# Altium PCB PCB.PcbDoc
Units mm, origin at the board's own origin, x right, y up, seen from the top; angles counter-clockwise.
Board outline 32 x 10 mm, 2 copper layers (Top Layer, Bottom Layer), stack 1.56 mm thick; 23 components, 13 nets, 54 pads, 13 vias.
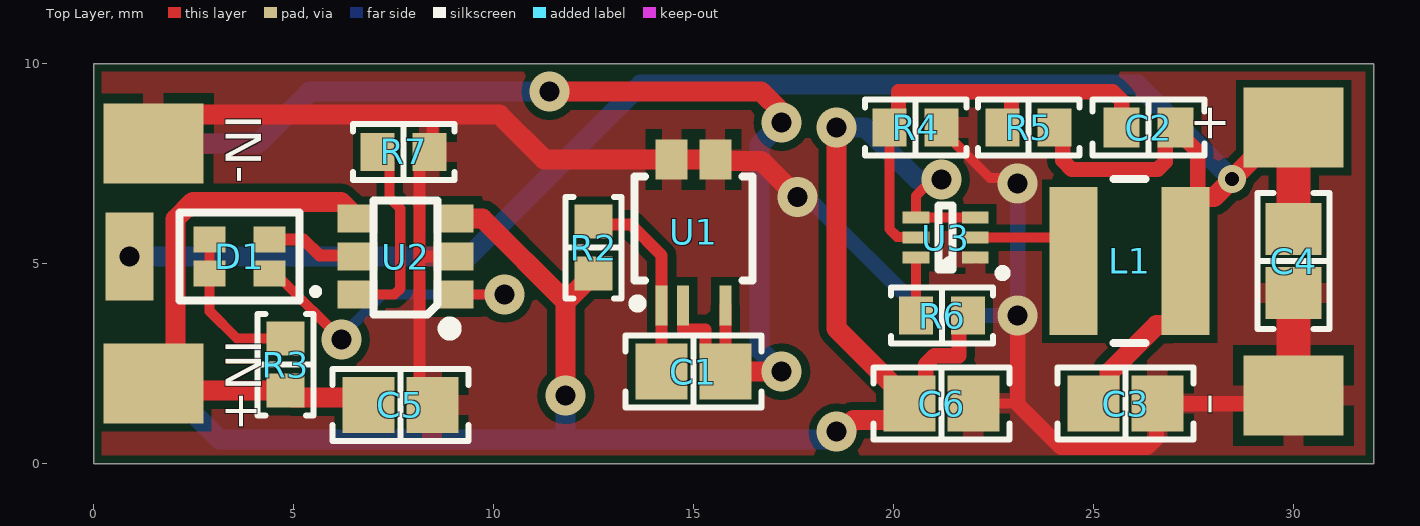
[diagram p0: Top Layer view]
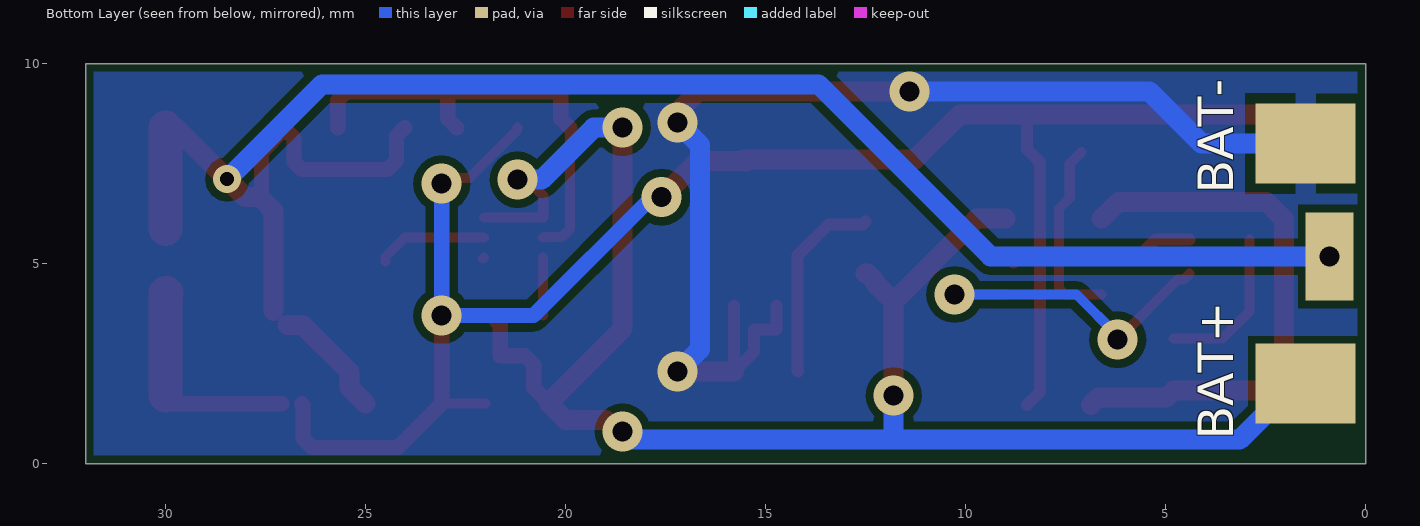
[diagram p1: Bottom Layer view, seen from below]
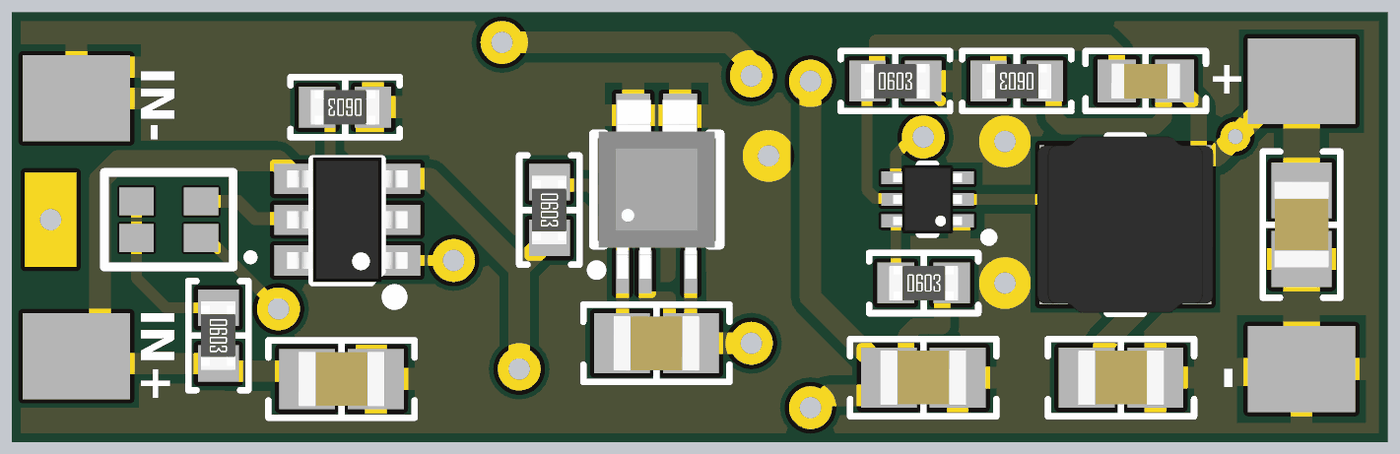
[diagram p2: 3D render of the assembled board from above, using the file's embedded part models]

## Layer stack, top to bottom
Top Solder: solder mask 0.02, Solder Resist, Dk 3.5
Top Layer: signal copper 0.03
Dielectric 1: dielectric 1.5, FR-4, Dk 4.8
Bottom Layer: signal copper 0.03
Bottom Solder: solder mask 0.02, Solder Resist, Dk 3.5

## Board outline
0,0 32,0 32,10 0,10

## Design rules (kind name [scope] priority, off if disabled: settings)
AssemblyTestPointUsage [All] p1 off:
AssemblyTestpoint [All] p1 off: testpointundercomponent=TRUE minsize=1.016 maxsize=2.54 preferedsize=1.524 minholesize=0 maxholesize=1.016 preferedholesize=0.813 testpointgrid=0.025 usegrid=TRUE gridtolerance=0 allowsidetop=TRUE allowsidebottom=TRUE
BoardOutlineClearance [All] p1: gap=0.2 ignorepadtopadclearanceinfootprint=FALSE except(0.4: Arc-SplitBarrior Arc-SplitContinuation Track-SplitBarrior Track-SplitContinuation SMDPad-SplitBarrior SMDPad-SplitContinuation THPad-SplitBarrior THPad-SplitContinuation Via-SplitBarrior Via-SplitContinuation Fill-SplitBarrior Fill-SplitContinuation Poly-SplitBarrior Poly-SplitContinuation Region-SplitBarrior Region-SplitContinuation Text-SplitBarrior Text-SplitContinuation)
Clearance "Clearance Bottom Layer" [OnLayer('Bottom Layer')] p1: gap=0.203 ignorepadtopadclearanceinfootprint=TRUE except(0.254: Arc-Text Track-Text SMDPad-Text THPad-Text Via-Text Fill-Text Poly-Text Region-Text Text-Text)
Clearance "Clearance Top Layer" [OnLayer('Top Layer')] p2: gap=0.203 ignorepadtopadclearanceinfootprint=TRUE except(0.254: Arc-Text Track-Text SMDPad-Text THPad-Text Via-Text Fill-Text Poly-Text Region-Text Text-Text)
Clearance [All] p3: gap=0.2 ignorepadtopadclearanceinfootprint=FALSE except(0.089: Arc-Arc Arc-Track Arc-SMDPad Track-Track Track-SMDPad SMDPad-SMDPad; 0.127: Arc-Via Track-Via SMDPad-Via THPad-Via Via-Via; 0.254: Arc-Text Track-Text SMDPad-Text THPad-Text Via-Text Fill-Text Poly-Text Region-Text Text-Text)
FabricationTestPointUsage [All] p1 off: valid=0 allowmultiple=FALSE
FabricationTestpoint [All] p1 off: side=3 testpointundercomponent=TRUE minsize=1.016 maxsize=2.54 preferedsize=1.524 minholesize=0 maxholesize=1.016 preferedholesize=0.813 testpointgrid=0.025 allowsidetop=TRUE allowsidebottom=TRUE usegrid=TRUE gridtolerance=0
HoleSize [All] p1: absolutevalues=TRUE maxlimit=6.3 minlimit=0.2 maxpercent=80.000 minpercent=20.000
MinimumAnnularRing [All] p1: minimumring=0.076
MinimumSolderMaskSliver [All] p1: minsoldermaskwidth=0.1
PolygonConnect PolygonConnect_1 [All] p1: thpad.connectstyle=Relief thpad.reliefconductorwidth=0.508 thpad.reliefentries=4 thpad.polygonreliefangle="90 Angle" thpad.airgapwidth=0.254 smdpad.connectstyle=Relief smdpad.reliefconductorwidth=0.508 smdpad.reliefentries=4 smdpad.polygonreliefangle="90 Angle" smdpad.airgapwidth=0.254 via.connectstyle=Direct via.reliefconductorwidth=0.508 via.reliefentries=4 via.polygonreliefangle="90 Angle" via.airgapwidth=0.254
RoomDefinition main [InComponentClass('main')] p1: confinementstyle=ConfineIn formatcopy=TRUE lockcomponents=FALSE outline -88.5,-61.5 -37.7,-61.5 -37.7,-36.1 -88.5,-36.1
RoutingCorners [All] p1: cornerstyle=Round minsetback=2.54 maxsetback=2.54
RoutingVias [All] p1: holewidth=0.5 width=1 viastyle="Through Hole" minholewidth=0.2 minwidth=0.45 maxholewidth=1 maxwidth=2
SilkToSilkClearance [All] p1: silktosilkclearance=0.1
SilkToSolderMaskClearance [IsPad] p1: minsilkscreentomaskgap=0.1 clearancetoexposedcopper=TRUE
SolderMaskExpansion [All] p1: expansion=0.102
Width [All] p1: maxlimit=2.54 minlimit=0.089 preferedwidth=0.381
21 further rules are at their usual default settings.

## Components (designator, comment, footprint, x,y, rotation, side; value= is the part's Value field where it differs from the comment)
+ "2MMx2.5MM" PAD_WITHOUT_HOLE_2X2.5MM#1 30,8.4 r90 top
- "2MMx2.5MM" PAD_WITHOUT_HOLE_2X2.5MM#1 30,1.7 r90 top
BAT+ "2MMx2.5MM" PAD_WITHOUT_HOLE_2X2.5MM#2 2.5,2.5 r270 bottom locked
BAT- "2MMx2.5MM" PAD_WITHOUT_HOLE_2X2.5MM#1 1.5,8 r90 bottom locked
C1 "0.1 µF" "CAP 0805_2012" 14.992,2.3 r180 top
C2 "120pF" "CAP 0603_1608" 26.375,8.4 r0 top
C3 "22µF" "CAP 0805_2012" 25.8,1.5 r180 top
C4 "22µF" "CAP 0805_2012" 30,5.06 r90 top
C5 "2.2 µF" "CAP 0805_2012" 7.667,1.469 r180 top
C6 "4.7µF" "CAP 0805_2012" 21.2,1.5 r180 top
D1 "Bicolor 1615" "LED 0603 1615 BICOLOR" 3.65,5.176 r180 top locked
IN+ "2MMx2.5MM" PAD_WITHOUT_HOLE_2X2.5MM#1 1.5,2 r90 top locked
IN- "2MMx2.5MM" PAD_WITHOUT_HOLE_2X2.5MM#1 1.5,8 r90 top locked
L1 "1 uH" "TAIYO YUDEN NR4018" 25.9,5.06 r0 top value="15 µH"
R2 "1 kOhms" "RES 0603_1608" 12.5,5.4 r270 top
R3 "330 Ohms" "RES 0603_1608" 4.8,2.477 r270 top
R4 "100 kOhms" "RES 0603_1608" 20.55,8.4 r0 top
R5 "150 kOhms" "RES 0603_1608" 23.374,8.4 r180 top
R6 "499 kOhms" "RES 0603_1608" 21.21,3.7 r0 top
R7 "3.9 kOhms" "RES 0603_1608" 7.75,7.795 r180 top
U1 "XB7608A" "PCB - LEADED - XYSEMI CPC5" 15,5.803 r0 top
U2 "TP4056" "SMD IC SOT-23-6" 7.8,5.177 r0 top
U3 "TPS62A01DRLR" "TI SOT-563 DRL" 21.3,5.65 r180 top

## Footprints (in the part's own frame and the unit in brackets; to place one, negate y for a bottom-side part, rotate by r counter-clockwise, add the part's x,y. Pads: shape width x height; smd on the part's side, far side on the other; paste and mask are expansions set on the pad)
"CAP 0603_1608" [mm] "Chip Capacitor, 2-Leads, Body 1.60x0.80mm, IPC Medium Density"
  rect 0.9x1 smd: 1(-0.675,0) 2(0.675,0)
  silkscreen extent -1.4,-0.7 1.4,0.7, body extent -0.8,-0.41 0.8,0.41, height 0.82
"CAP 0805_2012" [mm] "Chip Capacitor, 2-Leads, Body 2.00x1.20mm, IPC Medium Density"
  rect 1.3x1.4 smd: 1(-0.8,0) 2(0.8,0)
  silkscreen extent -1.7,-0.9 1.7,0.9, body extent -1,-0.64 1,0.64, height 1.26
"LED 0603 1615 BICOLOR" [mm] "SMD SMT Light Emitting Diode 1.6*0.8*0.6MM"
  rect 0.8x0.65 smd mask+0.05: 1(-0.75,0.425) 2(0.75,0.425) 3(-0.75,-0.425) 4(0.75,-0.425)
  silkscreen extent -1.94,-1.1 1.5,1.1
PAD_WITHOUT_HOLE_2X2.5MM#1 [mm]
  rect 2x2.5 smd: 1(0,0)
PAD_WITHOUT_HOLE_2X2.5MM#2 [mm]
  rect 2x2.5 smd: 1(0.5,1)
"PCB - LEADED - XYSEMI CPC5" [mm] "POD-CPC5"
  rect 0.3x1 smd: 1(-0.798,-1.847) 2(-0.268,-1.847) 3(0.792,-1.847)
  rect 0.8x1 smd: 4(0.542,1.803) 5(-0.548,1.803)
  silkscreen extent -1.5,-1.9 1.47,1.37, body extent -1.35,-2.01 1.35,2.16, height 1.05
"RES 0603_1608" [mm] "Chip Resistor, 2-Leads, Body 1.60x0.80mm, IPC Medium Density"
  rect 0.85x0.95 smd: 1(-0.65,0) 2(0.65,0)
  silkscreen extent -1.27,-0.7 1.27,0.7, body extent -0.8,-0.4 0.8,0.4, height 0.45
"SMD IC SOT-23-6" [mm] "SOT-223/SC-73; 4 Leads; Body 6.7 x 7.3 mm, inc. leads (LxW max)"
  rect 1x0.7 smd: 1(1.2,-0.95) 2(1.2,0) 3(1.2,0.95) 4(-1.2,0.95) 5(-1.2,0) 6(-1.2,-0.95)
  silkscreen extent -0.8,-1.9 1.2,1.4, body extent -1.4,-1.45 1.4,1.45, height 1.45
"TAIYO YUDEN NR4018" [mm] "Power Inductor, 2-Leads,Taiyo Yuden, NR4018T100M"
  rect 1.2x3.7 smd: 1(-1.4,0) 2(1.4,0)
  silkscreen extent -0.4,-2.05 0.4,2.05, body extent -2.05,-2.05 2.05,2.05, height 1.8
"TI SOT-563 DRL" [mm] "SOT DRL, 6-Leads, Body 1.10x1.60mm, Pitch 0.5mm, IPC Medium Density"
  rect 0.67x0.3 smd mask+0.07: 1(-0.74,0.5) 2(-0.74,0) 3(-0.74,-0.5) 4(0.74,-0.5) 5(0.74,0) 6(0.74,0.5)
  silkscreen extent -1.52,-0.8 0.18,0.99, body extent -0.8,-0.8 0.8,0.8, height 0.6

## Part data
+ - BAT+ BAT- IN+ IN-: library part PAD_WITHOUT_HOLE_3X3.5MM, "High: 3mm Length: 3.5mm"
C1: library part VJ0805Y104KFAAT, "SMT Capacitor", Device Package="0805 (2012 Metric)", manufacturer="Vishay Vitramon", Operating Temperature="-55°C ~ 150°C", Supplier Part Number 1=720-1753-1-ND, Temperature Coefficient=X7R, Tolerance=±10%, Voltage - Rated=50V, Applications="General Purpose", Capacitance="0.1 µF", componentlink1description=Datasheet, componentlink1url=http://www.vishay.com/docs/45199/vjcommercialseries.pdf, componentlink2description="DigiKey Link", componentlink2url=https://www.digikey.com/en/products/detail/vishay-vitramon/VJ0805Y104KFAAT/8311061, id=199, lastupdated=2023-01-03T20:10:53.590, Lifecycle Status=Active, Minimum Order=1, Mounting Type="Surface Mount, MLCC", Package / Case="0805 (2012 Metric)", packaging=TapeAndReel, partid=3420, Part Number=VJ0805Y104KFAAT, Part Status=Active, price=0.16, series=VJ, Size / Dimension="0.079\" L x 0.049\" W (2.00mm x 1.25mm)", Supplier 1=DigiKey, Thickness (Max)="0.057\" (1.45mm)"
C2: library part 06031A121KAT2A, "SMT Capacitor", Device Package="0603 (1608 Metric)", manufacturer="AVX Corporation", Operating Temperature="-55°C ~ 125°C", Supplier Part Number 1=478-6023-1-ND, Temperature Coefficient="C0G, NP0", Tolerance=±10%, Voltage - Rated=100V, Applications="General Purpose", Capacitance=120pF, componentlink1description=Datasheet, componentlink1url=http://datasheets.avx.com/C0GNP0-Dielectric.pdf, componentlink2description="DigiKey Link", componentlink2url=http://digikey.com/product-detail/en/avx-corporation/06031A121KAT2A/478-6023-1-ND/2208937, id=955, lastupdated=2020-09-02T01:03:28.977, Lifecycle Status=Active, Minimum Order=1, Mounting Type="Surface Mount, MLCC", Package / Case="0603 (1608 Metric)", packaging=TapeAndReel, partid=6218, Part Number=06031A121KAT2A, Part Status=Active, price=0.04, series=-, Size / Dimension="0.063\" L x 0.032\" W (1.60mm x 0.81mm)", Supplier 1=DigiKey, Thickness (Max)="0.035\" (0.90mm)"
C3 C4: library part 08056D226KAT2A, "SMT Capacitor", Device Package="0805 (2012 Metric)", manufacturer="AVX Corporation", Operating Temperature="-55°C ~ 85°C", Supplier Part Number 1=478-10069-1-ND, Temperature Coefficient=X5R, Tolerance=±10%, Voltage - Rated=6.3V, Applications="General Purpose", Capacitance=22µF, componentlink1description=Datasheet, componentlink1url=http://datasheets.avx.com/cx5r.pdf, componentlink2description="DigiKey Link", componentlink2url=http://digikey.com/product-detail/en/avx-corporation/08056D226KAT2A/478-10069-1-ND/6564291, id=197, lastupdated=2020-09-02T01:04:40.007, Lifecycle Status=Active, Minimum Order=1, Mounting Type="Surface Mount, MLCC", Package / Case="0805 (2012 Metric)", packaging=TapeAndReel, partid=3404, Part Number=08056D226KAT2A, Part Status=Active, price=0.18, series=-, Size / Dimension="0.079\" L x 0.049\" W (2.01mm x 1.25mm)", Supplier 1=DigiKey, Thickness (Max)="0.060\" (1.52mm)"
C5: library part GCM21BR71E225KA73K, "SMT Capacitor", Device Package="0805 (2012 Metric)", manufacturer="Murata Electronics", Operating Temperature="-55°C ~ 125°C", Ratings=AEC-Q200, Supplier Part Number 1=490-14744-1-ND, Temperature Coefficient=X7R, Tolerance=±10%, Voltage - Rated=25V, Applications=Automotive, Capacitance="2.2 µF", componentlink1description=Datasheet, componentlink1url=https://search.murata.co.jp/Ceramy/image/img/A01X/G101/ENG/GCM21BR71E225KA73-01.pdf, componentlink2description="DigiKey Link", componentlink2url=https://www.digikey.com/en/products/detail/murata-electronics/GCM21BR71E225KA73K/2592259, id=682, lastupdated=2023-01-03T20:10:47.513, Lifecycle Status=Active, Minimum Order=1, Mounting Type="Surface Mount, MLCC", Package / Case="0805 (2012 Metric)", packaging=TapeAndReel, partid=6110, Part Number=GCM21BR71E225KA73K, Part Status=Active, price=0.06, series=GCM, Size / Dimension="0.079\" L x 0.049\" W (2.00mm x 1.25mm)", Supplier 1=DigiKey, Thickness (Max)="0.055\" (1.40mm)"
C6: library part 0805ZD475KAT2A, "SMT Capacitor", Device Package="0805 (2012 Metric)", manufacturer="AVX Corporation", Operating Temperature="-55°C ~ 85°C", Supplier Part Number 1=478-1415-1-ND, Temperature Coefficient=X5R, Tolerance=±10%, Voltage - Rated=10V, Applications="General Purpose", Capacitance=4.7µF, componentlink1description=Datasheet, componentlink1url=http://datasheets.avx.com/cx5r.pdf, componentlink2description="DigiKey Link", componentlink2url=http://digikey.com/product-detail/en/avx-corporation/0805ZD475KAT2A/478-1415-1-ND/564447, id=128, lastupdated=2020-09-02T01:04:40.453, Lifecycle Status=Active, Minimum Order=1, Mounting Type="Surface Mount, MLCC", Package / Case="0805 (2012 Metric)", packaging=TapeAndReel, partid=3139, Part Number=0805ZD475KAT2A, Part Status=Active, price=0.12, series=-, Size / Dimension="0.079\" L x 0.049\" W (2.01mm x 1.25mm)", Supplier 1=DigiKey, Thickness (Max)="0.055\" (1.40mm)"
D1: library part "LED 0603 1615", "SMD SMT Light Emitting Diode 1.6*0.8*0.6MM", componentlink1description=Aliexpress, componentlink1url=https://www.aliexpress.com/item/4001174921701.html?spm=a2g0o.order_list.0.0.12d31802vfu5Sp
L1: library part NR4018T150M, "FIXED IND 1UH 650MA 300MOHM SMD", Current Rating (Amps)="650 mA", DC Resistance (DCR)="300mOhm Max", Frequency - Self Resonant=19MHz, Inductance="15 µH", Inductance Frequency - Test="100 kHz", manufacturer="Taiyo Yuden", Operating Temperature="-25°C ~ 120°C", Supplier Part Number 1=587-NR4018T150MCT-ND, Tolerance=±20%, componentlink1description=Datasheet, componentlink1url=https://www.yuden.co.jp/productdata/catalog/wound04_e.pdf, componentlink2description="DigiKey Link", componentlink2url=https://www.digikey.com/en/products/detail/taiyo-yuden/NR4018T150M/1171820, Height - Seated (Max)="0.071\" (1.80mm)", id=3749, lastupdated=2023-01-02T21:11:24.473, Lifecycle Status=Active, Material - Core=Ferrite, Minimum Order=1, Mounting Type="Surface Mount", packaging=TapeAndReel, partid=3777, Part Number=NR4018T150M, Part Status=Active, price=0.13, series=NR, Shielding=Shielded, Size / Dimension="0.157\" L x 0.157\" W (4.00mm x 4.00mm)", Supplier 1=DigiKey, Type="Drum Core, Wirewound"
R2: library part ERJ-U3RD1001V, "RES 1K OHM 0.5% 1/10W 0603 SMD", Device Package="0603 (1608 Metric)", manufacturer="Panasonic Electronic Components", Operating Temperature="-55°C ~ 155°C", Power (Watts)="0.1W, 1/10W", Ratings=AEC-Q200, Supplier Device Package=0603, Supplier Part Number 1=10-ERJ-U3RD1001VCT-ND, Temperature Coefficient=±50ppm/°C, Tolerance=±0.5%, componentlink1description=Datasheet, componentlink1url=https://industrial.panasonic.com/cdbs/www-data/pdf/RDP0000/RDP0000C343.pdf, componentlink2description="DigiKey Link", componentlink2url=https://www.digikey.com/en/products/detail/panasonic-electronic-components/ERJ-U3RD1001V/12549507, Composition="Thick Film", Features="Anti-Sulfur, Automotive AEC-Q200", Height - Seated (Max)="0.022\" (0.55mm)", id=17229, lastupdated=2023-01-02T20:27:49.777, Lifecycle Status=Active, Minimum Order=1, Number of Terminations=2, Package / Case="0603 (1608 Metric)", packaging=TapeAndReel, partid=69166, Part Number=ERJ-U3RD1001V, Part Status=Active, price=0.03, Resistance="1 kOhms", series=ERJ-U3R, Size / Dimension="0.063\" L x 0.031\" W (1.60mm x 0.80mm)", Supplier 1=DigiKey
R3: library part ERA-3AEB331V, "RES SMD 330 OHM 0.1% 1/10W 0603", Device Package="0603 (1608 Metric)", manufacturer="Panasonic Electronic Components", Operating Temperature="-55°C ~ 155°C", Power (Watts)="0.1W, 1/10W", Ratings=AEC-Q200, Supplier Device Package=0603, Supplier Part Number 1=P330DBCT-ND, Temperature Coefficient=±25ppm/°C, Tolerance=±0.1%, componentlink1description=Datasheet, componentlink1url=https://industrial.panasonic.com/cdbs/www-data/pdf/RDM0000/AOA0000C307.pdf, componentlink2description="DigiKey Link", componentlink2url=https://www.digikey.com/en/products/detail/panasonic-electronic-components/ERA-3AEB331V/1465842, Composition="Thin Film", Features="Automotive AEC-Q200", Height - Seated (Max)="0.022\" (0.55mm)", id=331, lastupdated=2023-01-02T20:30:24.253, Lifecycle Status=Active, Minimum Order=1, Number of Terminations=2, Package / Case="0603 (1608 Metric)", packaging=TapeAndReel, partid=5565, Part Number=ERA-3AEB331V, Part Status=Active, price=0.03, Resistance="330 Ohms", series=ERA-3A, Size / Dimension="0.063\" L x 0.031\" W (1.60mm x 0.80mm)", Supplier 1=DigiKey
R4: library part ERJ-U03J104V, "RES 100K OHM 5% 1/10W 0603 SMD", Device Package="0603 (1608 Metric)", manufacturer="Panasonic Electronic Components", Operating Temperature="-55°C ~ 155°C", Power (Watts)="0.1W, 1/10W", Ratings=AEC-Q200, Supplier Device Package=0603, Supplier Part Number 1=10-ERJ-U03J104VCT-ND, Temperature Coefficient=±200ppm/°C, Tolerance=±5%, componentlink1description=Datasheet, componentlink1url=https://industrial.panasonic.com/cdbs/www-data/pdf/RDP0000/AOA0000C334.pdf, componentlink2description="DigiKey Link", componentlink2url=https://www.digikey.com/en/products/detail/panasonic-electronic-components/ERJ-U03J104V/11635952, Composition="Thick Film", Features="Anti-Sulfur, Automotive AEC-Q200", Height - Seated (Max)="0.022\" (0.55mm)", id=16727, lastupdated=2023-01-02T20:27:56.093, Lifecycle Status=Active, Minimum Order=1, Number of Terminations=2, Package / Case="0603 (1608 Metric)", packaging=TapeAndReel, partid=67627, Part Number=ERJ-U03J104V, Part Status=Active, price=0.01, Resistance="100 kOhms", series=ERJ-U03, Size / Dimension="0.063\" L x 0.031\" W (1.60mm x 0.80mm)", Supplier 1=DigiKey
R5: library part ERJ-H3ED1503V, "RES 150K OHM 0.5% 1/6W 0603", Device Package="0603 (1608 Metric)", manufacturer="Panasonic Electronic Components", Operating Temperature="-55°C ~ 175°C", Power (Watts)="0.125W, 1/8W", Ratings=AEC-Q200, Supplier Device Package=0603, Supplier Part Number 1=10-ERJ-H3ED1503VCT-ND, Temperature Coefficient=±100ppm/°C, Tolerance=±0.5%, componentlink1description=Datasheet, componentlink1url=https://b2b-api.panasonic.eu/file_stream/pids/fileversion/236250, componentlink2description="DigiKey Link", componentlink2url=https://www.digikey.com/en/products/detail/panasonic-electronic-components/ERJ-H3ED1503V/13878124, Composition="Thick Film", Features="Automotive AEC-Q200", Height - Seated (Max)="0.022\" (0.55mm)", id=15235, lastupdated=2023-01-02T20:28:19.700, Lifecycle Status=Active, Minimum Order=1, Number of Terminations=2, Package / Case="0603 (1608 Metric)", packaging=TapeAndReel, partid=63770, Part Number=ERJ-H3ED1503V, Part Status=Active, price=0.04, Resistance="150 kOhms", series=ERJ-H3E, Size / Dimension="0.063\" L x 0.031\" W (1.60mm x 0.80mm)", Supplier 1=DigiKey
R6: library part ERJ-3EKF4993V, "RES SMD 499K OHM 1% 1/10W 0603", Device Package="0603 (1608 Metric)", manufacturer="Panasonic Electronic Components", Operating Temperature="-55°C ~ 155°C", Power (Watts)="0.1W, 1/10W", Ratings=AEC-Q200, Supplier Device Package=0603, Supplier Part Number 1=P499KHCT-ND, Temperature Coefficient=±100ppm/°C, Tolerance=±1%, componentlink1description=Datasheet, componentlink1url=https://industrial.panasonic.com/cdbs/www-data/pdf/RDA0000/AOA0000C304.pdf, componentlink2description="DigiKey Link", componentlink2url=https://www.digikey.com/en/products/detail/panasonic-electronic-components/ERJ-3EKF4993V/196382, Composition="Thick Film", Features="Automotive AEC-Q200", Height - Seated (Max)="0.022\" (0.55mm)", id=9264, lastupdated=2023-01-02T20:29:07.173, Lifecycle Status=Active, Minimum Order=1, Number of Terminations=2, Package / Case="0603 (1608 Metric)", packaging=TapeAndReel, partid=23062, Part Number=ERJ-3EKF4993V, Part Status=Active, price=0.01, Resistance="499 kOhms", series=ERJ-3EK, Size / Dimension="0.063\" L x 0.031\" W (1.60mm x 0.80mm)", Supplier 1=DigiKey
R7: library part ERJ-3GEYJ392V, "RES SMD 3.9K OHM 5% 1/10W 0603", Device Package="0603 (1608 Metric)", manufacturer="Panasonic Electronic Components", Operating Temperature="-55°C ~ 155°C", Power (Watts)="0.1W, 1/10W", Ratings=AEC-Q200, Supplier Device Package=0603, Supplier Part Number 1=P3.9KGCT-ND, Temperature Coefficient=±200ppm/°C, Tolerance=±5%, componentlink1description=Datasheet, componentlink1url=http://industrial.panasonic.com/www-cgi/jvcr13pz.cgi?E+PZ+3+AOA0001+ERJ3GEYJ392V+7+WW, componentlink2description="DigiKey Link", componentlink2url=https://www.digikey.com/en/products/detail/panasonic-electronic-components/ERJ-3GEYJ392V/135900, Composition="Thick Film", Features="Automotive AEC-Q200", Height - Seated (Max)="0.022\" (0.55mm)", id=7011, lastupdated=2023-01-02T20:29:27.293, Lifecycle Status=Active, Minimum Order=1, Number of Terminations=2, Package / Case="0603 (1608 Metric)", packaging=TapeAndReel, partid=19216, Part Number=ERJ-3GEYJ392V, Part Status=Active, price=0.01, Resistance="3.9 kOhms", series=ERJ-3G, Size / Dimension="0.063\" L x 0.031\" W (1.60mm x 0.80mm)", Supplier 1=DigiKey
U1: "CPC-5 Battery Management IC"
U2: library part TP4057, "500mA Linear Li-Ion Battery Charger", componentlink1description=Datasheet, componentlink1url=https://pdf1.alldatasheet.com/datasheet-pdf/view/1134940/TPOWER/TP4057.html
U3: "2.5-V to 5.5-V input, 1-A high-efficiency step-down converter with forced PWM in SOT-563 package", Mfr_Name="Texas Instruments", componentlink1description=Datasheet, componentlink1url=https://www.ti.com/document-viewer/TPS62A01A/datasheet/GUID-583A9EFF-0876-4B6A-9171-86BE16EA9829#GUID-016A0F07-62BF-4703-9B43-9200616E2C9F, Copyright="Copyright (C) 2022 Ultra Librarian. All rights reserved.", Manufacturer_Part_Number=TPS62A01DRLR, RefDes=RefDes, Type=DEV

## Free pads (board coordinates)
  rect 1.2x2.2 hole 0.5: 2(0.9,5.177)

## Via types
v1: diameter 1, hole 0.5, Top Layer to Bottom Layer, 12 vias
v2: diameter 0.7, hole 0.35, Top Layer to Bottom Layer, 1 vias

## Nets (pads, with @x,y where several pads share a name; then routed paths per layer and width w, separated by ;. In a path a pad name is that pad's centre, name@x,y a point inside that pad or via, vN(x,y) a via of type N, cw(c..) or ccw(c..) an arc to the next point about the centre after c; other vN are vias at no path point)
5V: C5.2 IN+.1 R3.2 U2.4 | length 14.8
  Top Layer w0.5: U2.4 6.18,6.547 2.48,6.547 2.047,6.114 2.047,2.547 IN+.1 1.673,1.827 R3.2 4.975,1.652 6.684,1.652 C5.2
BAT+: BAT+.1 C6.2 R2.2 R6.2 U2.3 U3.3 U3.4 | length 44.7
  Top Layer w0.254: v1@21.2,6.965 20.829,6.965 20.56,6.695 U3.4 U3.3
  Top Layer w0.381: C6.2 20.8,1.9 20.8,2.477 21.023,2.7 21.637,2.7 21.637,3.477 R6.2
  Top Layer w0.5: U2.3 9.723,6.127 11.8,4.05 ; v1(11.8,1.7) 11.8,4.05 ; R2.2 12.45,4.75 12.275,4.575 12.275,4.525 11.8,4.05 ; v1(18.575,0.8) 18.71,0.8 19,1.09 20,1.09 20.4,1.49 C6.2 20.4,1.55 18.575,3.375 v1(18.575,8.4)
  Bottom Layer w0.5: BAT+.1 1.75,2 3.15,0.6 11.8,0.6 ; v1(11.8,1.7) 11.8,0.6 ; v1(18.575,0.8) 18.375,0.6 11.8,0.6 ; v1(18.575,8.4) 19.298,8.4 20.598,7.1 v1(21.2,7.1)
BAT-: BAT-.1 C1.1 U1.2 U1.3 | length 28.9
  Top Layer w0.3: U1.2 14.732,3.358 15.292,3.358 15.292,2.8 C1.1 U1.3
  Top Layer w0.5: v1(11.4,9.3) 16.69,9.3 17.2,8.79 v1(17.2,8.523) ; C1.1 v1(17.2,2.3)
  Bottom Layer w0.5: BAT-.1 4.1,8 5.4,9.3 v1(11.4,9.3) ; v1(17.2,2.3) 16.647,2.853 16.647,7.97 v1(17.2,8.523)
CHARGE: D1.1 U2.1 | length 8.4
  Top Layer w0.254: D1.1 4.549,4.602 4.698,4.602 v1(6.2,3.1) ; U2.1 v1(10.273,4.227)
  Bottom Layer w0.254: v1(6.2,3.1) 6.2,3.2 7.227,4.227 v1(10.273,4.227)
CHARGE-: -.1 C3.1 C4.1 C5.1 C6.1 IN-.1 R4.2 R7.1 U1.4 U1.5 U2.2 U3.1 | length 51.9
  Top Layer w0.254: R4.2 21.2,8.35 22.41,7.14 22.957,7.14 v1(23.1,6.998) ; C6.1 23.093,1.5 23.1,1.493 ; U3.1 U3.1@22.063,5.127
  Top Layer w0.3: C5.1 8.147,1.789 8.147,5.177 ; 8.467,8.723 8.467,7.862 R7.1 8.147,7.542 8.147,5.177 ; U2.2@8.8,5.027 8.65,5.177 8.147,5.177
  Top Layer w0.381: v1(23.1,3.701) 23.1,1.493 24.187,0.406 26.346,0.406 26.569,0.629 26.569,1.469 C3.1 ; C3.1@27.1,1.5 29.8,1.5 -.1
  Top Layer w0.5: IN-.1 2.223,8.723 8.467,8.723 10.147,8.723 11.264,7.606 U1.5 15.442,7.606 15.492,7.556 U1.4 15.578,7.57 16.69,7.57 v1(17.6,6.66)
  Top Layer w0.85: C4.1@29.975,4.26 C4.1 -.1
  Bottom Layer w0.381: v1(17.6,6.66) 17.846,6.66 20.806,3.701 v1(23.1,3.701) v1(23.1,6.998)
NetC1_2: C1.2 R2.1 U1.1 | length 5
  Top Layer w0.3: R2.1 12.57,5.98 13.425,5.98 14.202,5.203 U1.1 14.202,2.31 C1.2
NetC2_1: C2.1 R4.1 R5.2 U3.5 | length 11.6
  Top Layer w0.254: R4.1 19.895,8.395 19.895,5.863 20.088,5.67 20.54,5.67 U3.5
  Top Layer w0.381: R4.1 20.123,8.623 20.123,9.3 22.947,9.3 ; R5.2 22.947,8.623 22.947,9.3 ; C2.1 25.7,9.077 25.477,9.3 22.947,9.3
NetD1_2: D1.2 D1.4 R3.1 | length 4
  Top Layer w0.254: D1.4 D1.2 2.9,3.81 3.583,3.127 R3.1
NetL1_1: L1.1 U3.2 | length 2.8
  Top Layer w0.254: U3.2 24.027,5.65 24.5,5.177 L1.1
NetR6_1: R6.1 U3.6 | length 1.5
  Top Layer w0.25: R6.1 U3.6
NetR7_2: R7.2 U2.6 | length 4.8
  Top Layer w0.254: U2.6 7.518,4.227 7.667,4.376 7.667,6.377 7.398,6.646 7.398,7.497 R7.2
OUT+: +.1 C2.2 C3.2 C4.2 L1.2 pad.2 R5.1 | length 48.6
  Top Layer w0.381: R5.1 24.227,8.197 24.227,7.577 24.45,7.354 26.6,7.354 26.79,7.544 26.79,8.14 C2.2 27.05,8.35 27.605,7.795 27.605,6.615 L1.2@27.605,6.555
  Top Layer w0.5: C3.2 25.4,1.9 25.4,2.291 26.569,3.46 L1.2@26.95,3.46 ; L1.2@27.3,3.81 L1.2 27.3,6.31 27.605,6.615 27.65,6.66 28.01,6.66 v2(28.46,7.11) 29.75,8.4 +.1
  Top Layer w0.85: C4.2 +.1
  Bottom Layer w0.5: pad.2 9.376,5.177 13.675,9.476 26.094,9.476 v2(28.46,7.11)
STANDBY: D1.3 U2.5 | length 2.4
  Top Layer w0.3: D1.3 5.252,5.601 5.65,5.203 6.574,5.203 U2.5

## Polygon pours and split planes (outlines as drawn)
BAT- on Bottom Layer "BAT-_L02_P000" (solid, remove dead copper, pour order 0): 0,0 32,0 32,10 0,10
CHARGE- on Top Layer "CHARGE-_L01_P004" (solid, remove dead copper, pour order 4): 0,0 32,0 32,10 0,10

## Silkscreen, mask and mechanical layers (free items; w line width, h text height)
Board outline:
  the board outline again, w0.2

## Dimensions
32,10 to 32,0 on Board outline
0,0 to 32,0 on Board outline